# Altium PCB Main.PcbDoc
Units mil, origin at the board's own origin, x right, y up, seen from the top; angles counter-clockwise.
Board outline 1330 x 1245 mil, 4 copper layers (Top Layer, Int1 (GND), Int2, Bottom Layer), stack 61.811 mil thick; 29 components, 23 nets, 113 pads, 42 vias.
Unrouted connection lines stored in the file: 1.
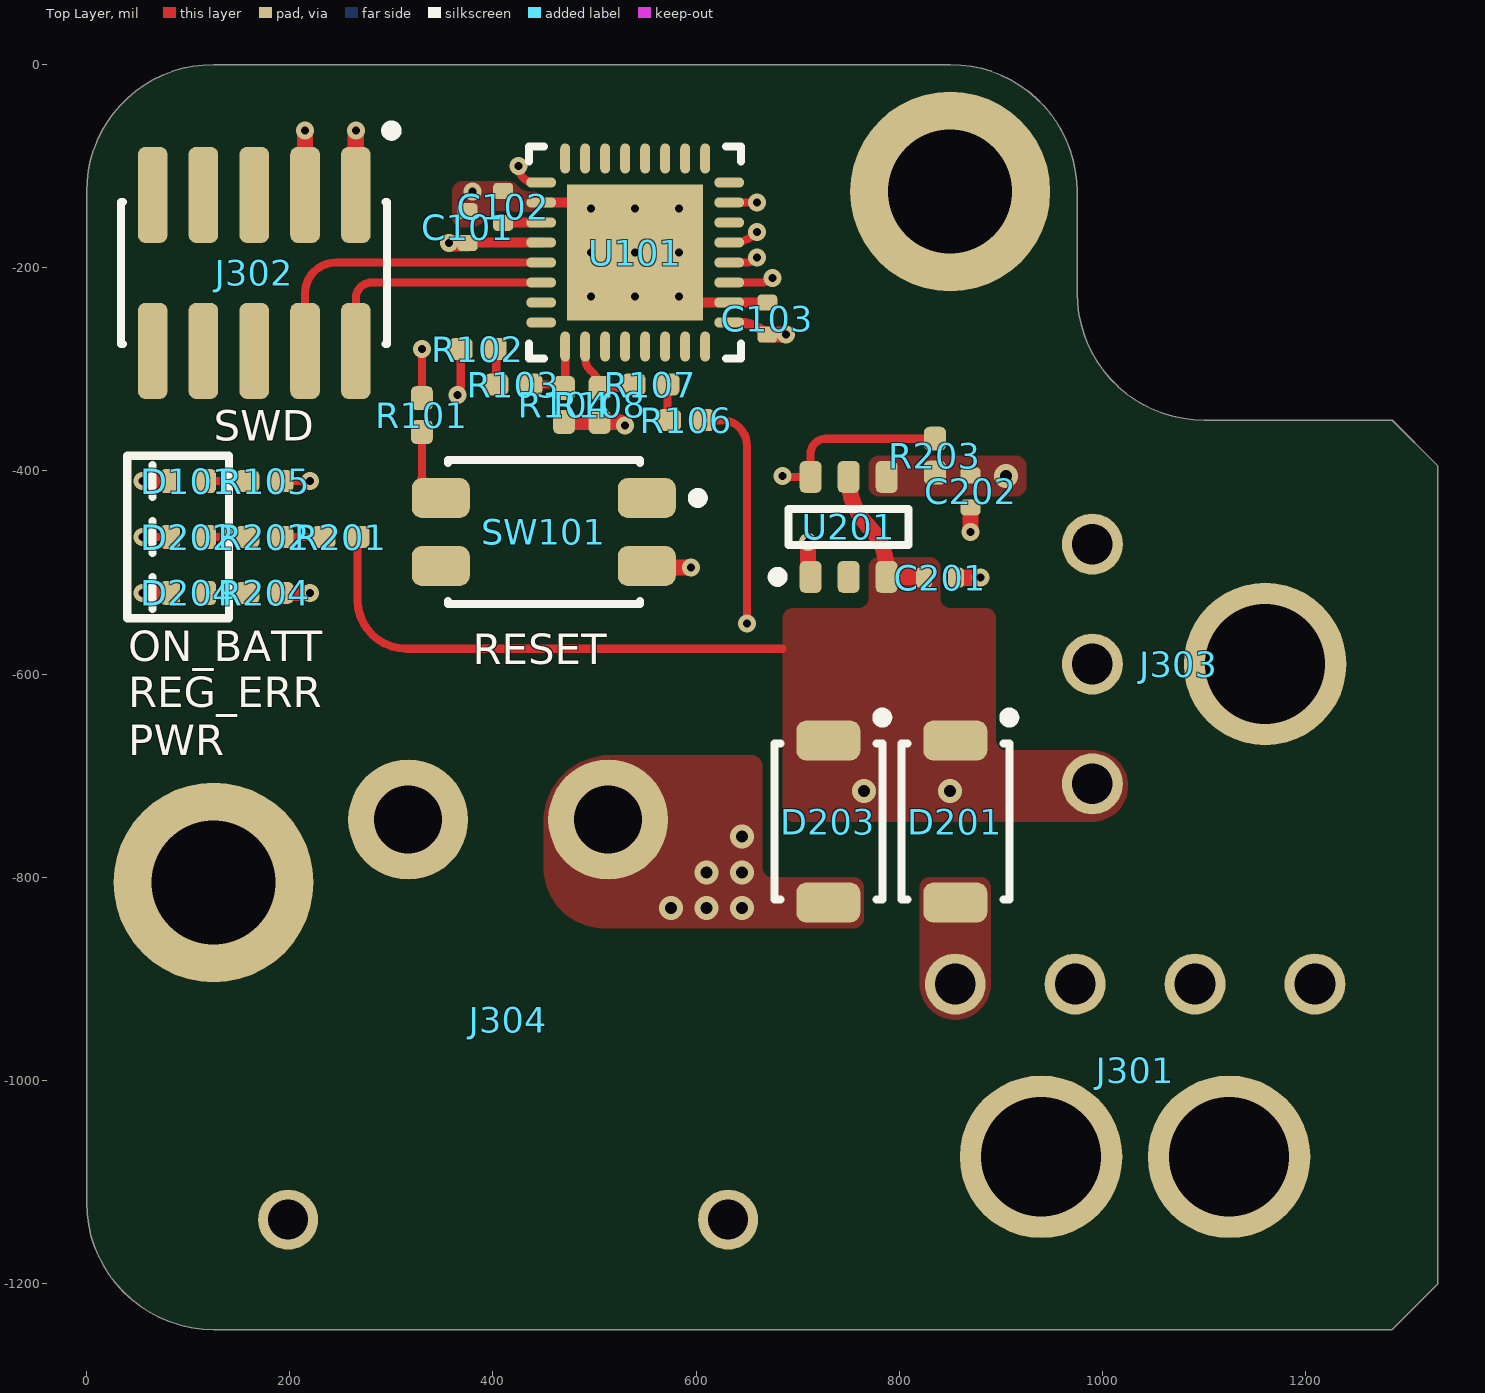
[diagram p0: Top Layer view]
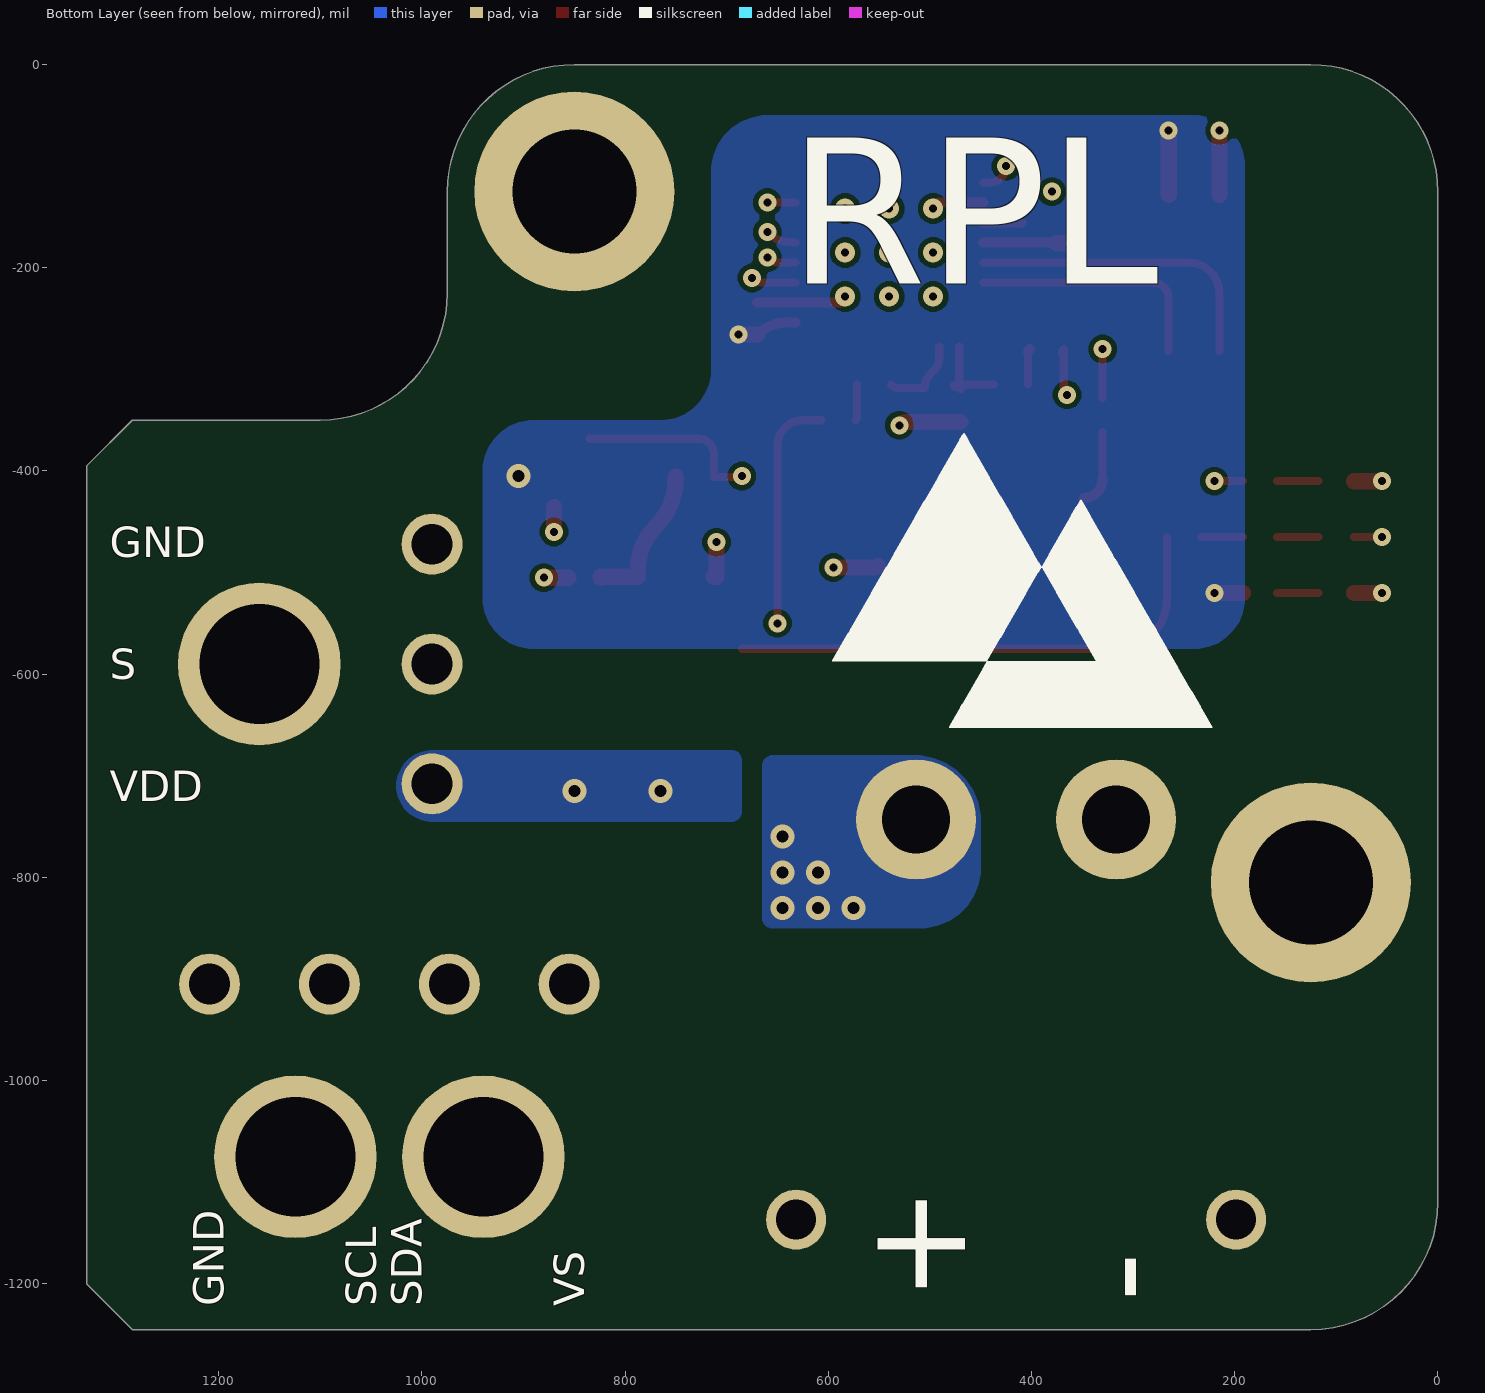
[diagram p1: Bottom Layer view, seen from below]
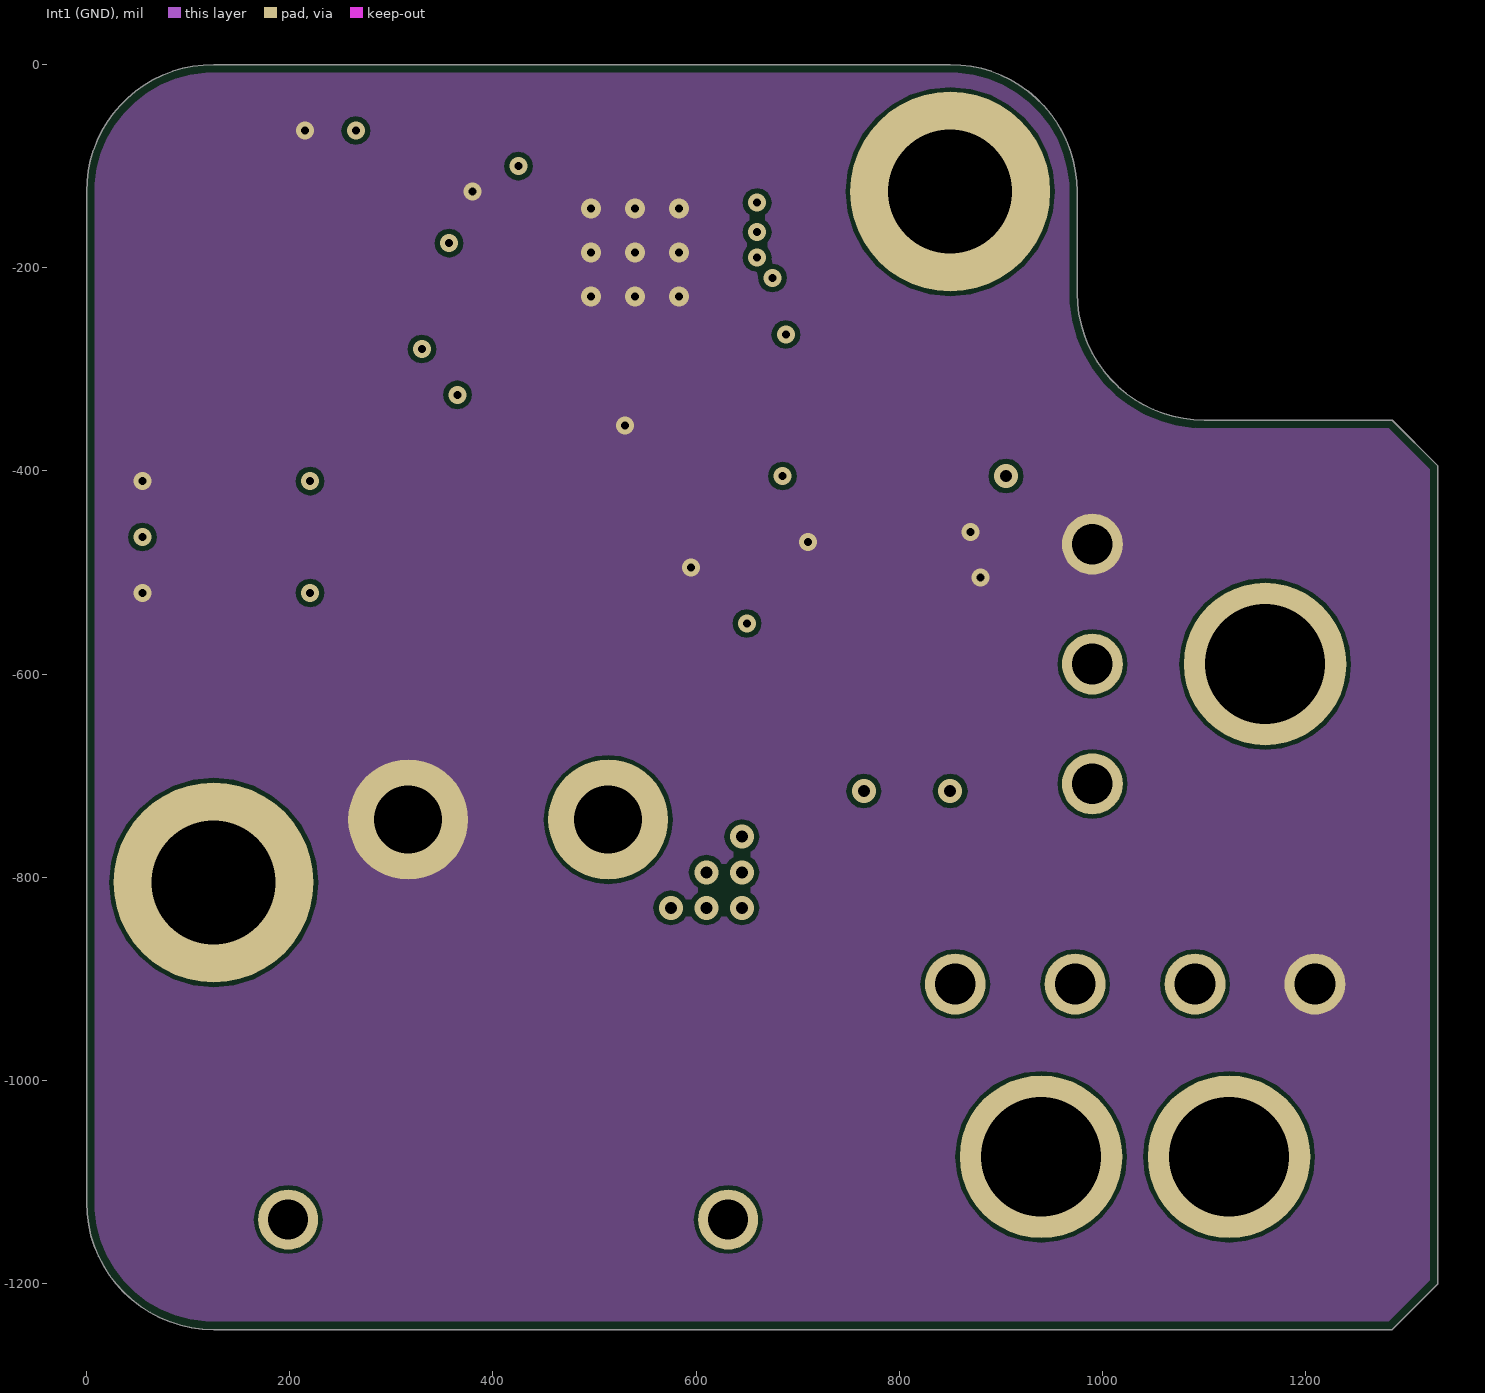
[diagram p2: Int1 (GND)]
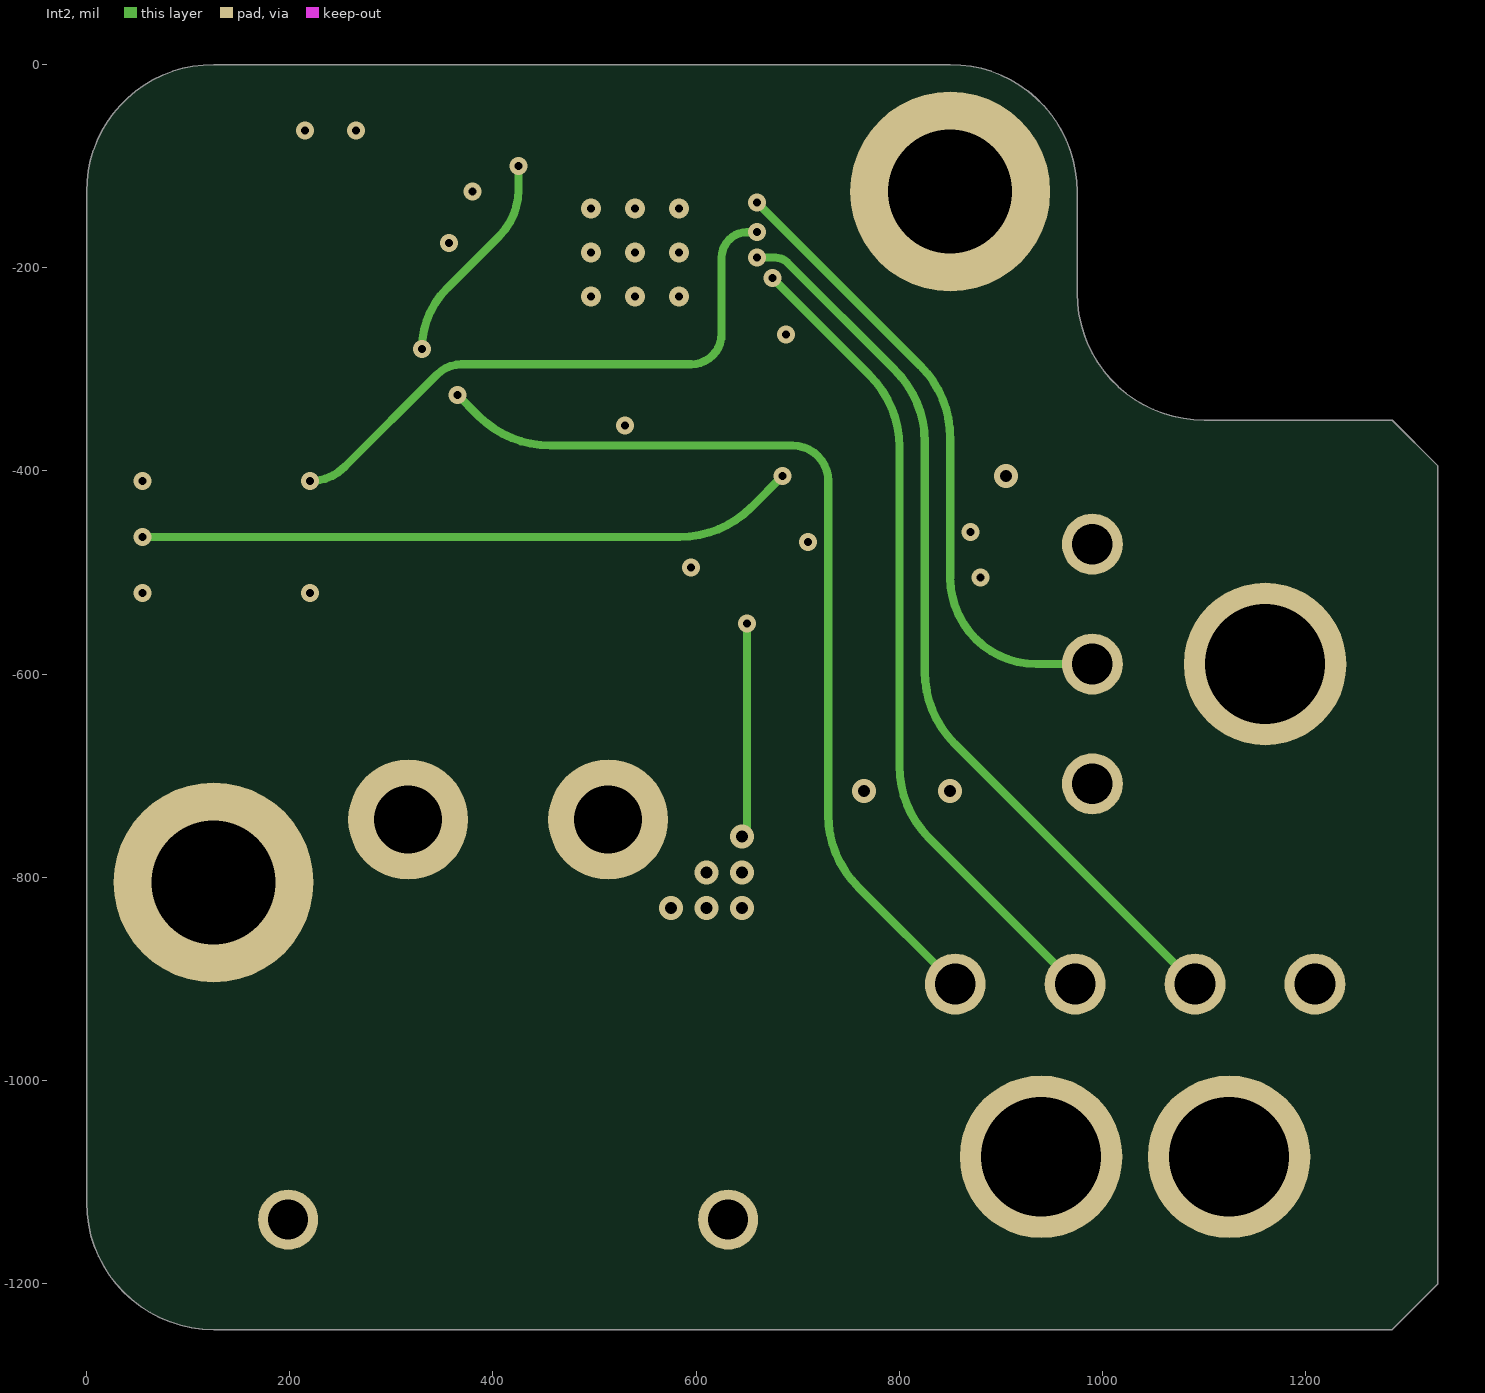
[diagram p3: Int2]
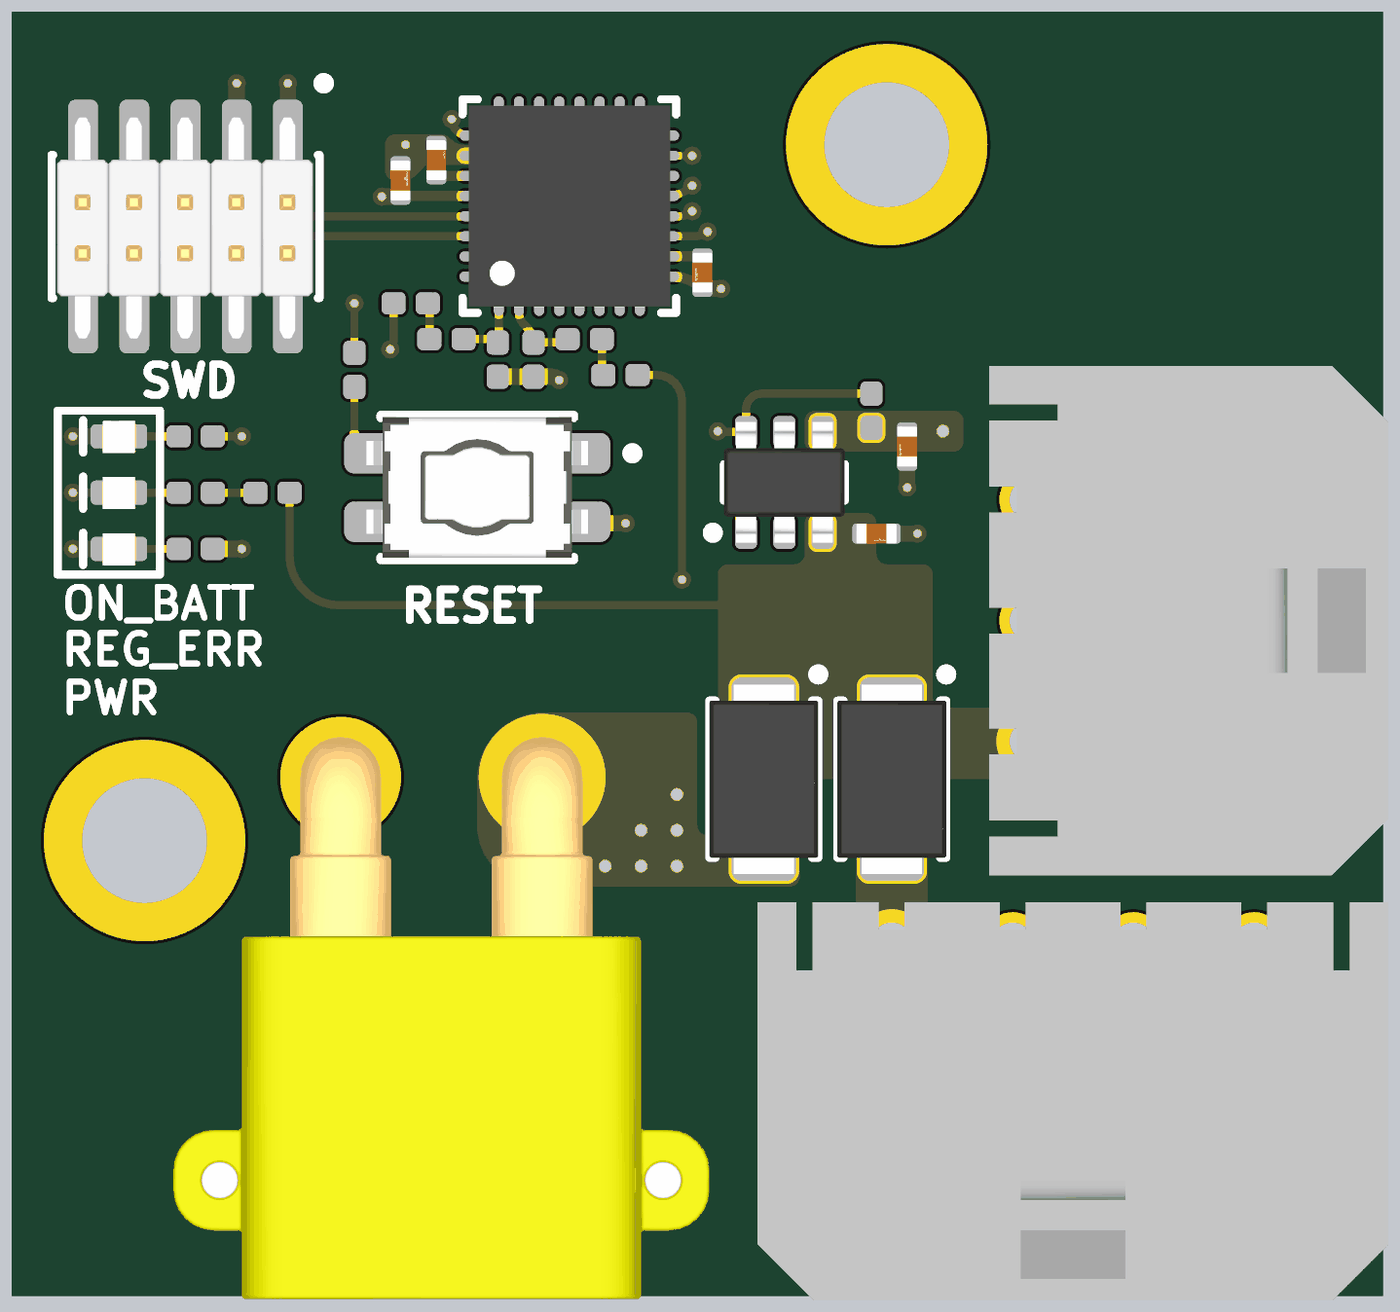
[diagram p4: 3D render of the assembled board from above, using the file's embedded part models]

## Layer stack, top to bottom
Top Solder: solder mask 0.5, SM-001, Dk 3.8
Top Layer: signal copper 1.378
Dielectric 1: prepreg 3.937, PP-017, Dk 4.05
Int1 (GND): signal copper 0.689
Dielectric 3: core 49.803, Core-039, Dk 4.5
Int2: signal copper 0.689
Dielectric 5: prepreg 3.937, PP-017, Dk 4.05
Bottom Layer: signal copper 1.378
Bottom Solder: solder mask 0.5, SM-001, Dk 3.8

## Board outline
0,-1120 0,-125 cw(c125,-125) 125,0 850,0 cw(c850,-125) 975,-125 975,-225 ccw(c1100,-225) 1100,-350 1285,-350 1330,-395 1330,-1200 1285,-1245 125,-1245 cw(c125,-1120)

## Design rules (kind name [scope] priority, off if disabled: settings)
BoardOutlineClearance [All] p1: gap=7.87 ignorepadtopadclearanceinfootprint=FALSE
Clearance [All] p1: gap=4 ignorepadtopadclearanceinfootprint=FALSE except(5: Arc-Via Track-Via SMDPad-Via THPad-Via Via-Via Via-Fill Via-Poly Via-Region Via-Text; 9.84: Arc-Hole Track-Hole SMDPad-Hole THPad-Hole Via-Hole Fill-Hole Poly-Hole Region-Hole Text-Hole)
ComponentClearance [All] p1: gap=4 collisioncheckmode=3 verticalgap=4 showdistances=TRUE
DiffPairsRouting [All] p1: maxlimit=4 minlimit=4 mostfreqgap=4 toplayer_minwidth=4 toplayer_maxwidth=71497.94 toplayer_prefwidth=4 midlayer1_minwidth=4 midlayer1_maxwidth=71497.94 midlayer1_prefwidth=4 midlayer2_minwidth=4 midlayer2_maxwidth=71497.94 midlayer2_prefwidth=4 bottomlayer_minwidth=4 bottomlayer_maxwidth=71497.94 bottomlayer_prefwidth=4 maxuncoupledlength=500
Height [All] p1: minheight=0 maxheight=71497.94 prefheight=500
HoleSize [All] p1: absolutevalues=TRUE maxlimit=248.03 minlimit=7.87 maxpercent=80.000 minpercent=20.000
HoleToHoleClearance [All] p1: gap=9.84 allowstackedmicrovias=FALSE
MinimumAnnularRing [All] p1: minimumring=3
MinimumSolderMaskSliver [All] p1: minsoldermaskwidth=0
PlaneClearance [All] p1: clearance=4
PlaneConnect PlaneConnectPowerPads [InPadClass('PowerPads')] p1: planeconnectstyle=Direct reliefexpansion=20 reliefentries=4 reliefconductorwidth=10 reliefairgap=10
PlaneConnect [All] p2: pad.planeconnectstyle=Relief pad.reliefexpansion=11.81 pad.reliefentries=4 pad.reliefconductorwidth=4 pad.reliefairgap=4 via.planeconnectstyle=Direct via.reliefexpansion=11.81 via.reliefentries=4 via.reliefconductorwidth=5 via.reliefairgap=5
PolygonConnect PolygonConnectPowerPads [All vs (InPadClass('PowerPads'))] p1: connectstyle=Direct reliefconductorwidth=10 reliefentries=4 polygonreliefangle="90 Angle" airgapwidth=10
PolygonConnect [All] p2: connectstyle=Direct reliefconductorwidth=16 reliefentries=4 polygonreliefangle="90 Angle" airgapwidth=4
RoomDefinition Power [InComponentClass('Power')] p1: confinementstyle=ConfineIn formatcopy=TRUE lockcomponents=FALSE outline 55,-855 925,-855 925,-340 55,-340
RoomDefinition SAMD21 [InComponentClass('SAMD21')] p2: confinementstyle=ConfineIn formatcopy=TRUE lockcomponents=FALSE outline 55,-545 700,-545 700,-65 55,-65
RoomDefinition Ports [InComponentClass('Ports')] p3: confinementstyle=ConfineIn formatcopy=TRUE lockcomponents=FALSE outline 20,-1260 1345,-1260 1345,-65 20,-65
RoutingVias [All] p1: holewidth=7.87 width=17.72 viastyle="Through Hole" minholewidth=7.87 minwidth=17.72 maxholewidth=248.03 maxwidth=257.87
SilkToSilkClearance [All] p1: silktosilkclearance=0
SilkToSolderMaskClearance [IsPad] p1: minsilkscreentomaskgap=4 clearancetoexposedcopper=TRUE
SolderMaskExpansion [All] p1: expansion=2.95 istentingtop=FALSE
Width [All] p1: maxlimit=71497.94 minlimit=4 preferedwidth=4
20 further rules are at their usual default settings.

## Classes and differential pairs
component class SAMD21: C101 C102 C103 D101 R101 R102 R103 R104 R105 R106 R107 R108 SW101 U101
component class Power: C201 C202 D201 D202 D203 D204 R201 R202 R203 R204 U201
component class Ports: J301 J302 J303 J304

## Components (designator, comment, footprint, x,y, rotation, side; value= is the part's Value field where it differs from the comment)
C101 "100n" FP-GCM155-0_05-MFG 375,-160 r90 top
C102 "1u" FP-GRM155-0_1-MFG 410,-140 r90 top
C103 "100n" FP-GCM155-0_05-MFG 670,-250 r270 top
C201 "470n" FP-GRT155-0_05-MFG 840,-505 r0 top
C202 "470n" FP-GRT155-0_05-MFG 870,-420 r270 top
D101 "Orange" FP-SML-P1-MFG 100,-410 r0 top
D201 "5A" SODFL470X105-2L 855,-745 r270 top
D202 "Red" FP-SML-P1-MFG 100,-465 r0 top
D203 "5A" SODFL470X105-2L 730,-745 r270 top
D204 "Green" FP-SML-P1-MFG 100,-520 r0 top
J301 "436500400" 436500400 1209,-905 r180 top
J302 "M50-3600542" FP-M50-3600542-MFG 165,-205 r180 top
J303 "436500300" 436500300 990,-472 r270 top
J304 "XT30PW-M" XT30PW-M 415,-940 r180 top locked
R101 "5k1" RESC1005X04N 330,-345 r90 top
R102 "5k1" RESC1005X04N 385,-280 r180 top
R103 "5k1" RESC1005X04N 420,-315 r180 top
R104 "5k1" RESC1005X04N 470,-335 r90 top
R105 "470" RESC1005X04N 175,-410 r180 top
R106 "5k1" RESC1005X04N 590,-350 r0 top
R107 "5k1" RESC1005X04N 555,-315 r0 top
R108 "5k1" RESC1005X04N 505,-335 r90 top
R201 "470" RESC1005X04N 250,-465 r0 top
R202 "470" RESC1005X04N 175,-465 r0 top
R203 "330k" RESC1005X04N 835,-385 r90 top
R204 "470" RESC1005X04N 175,-520 r0 top
SW101 "EVQ-P2402M" EVQ-P2402M 450,-460 r270 top
U101 "ATSAMD21E17L" QFN50P500X500X100_HS-33L 540,-185 r90 top
U201 "3v3" SOT95P280X145-6L 750,-455 r90 top

## Footprints (in the part's own frame and the unit in brackets; to place one, negate y for a bottom-side part, rotate by r counter-clockwise, add the part's x,y. Pads: shape width x height; smd on the part's side, far side on the other; paste and mask are expansions set on the pad)
436500300 [mil] "Molex 3 Pin Micro-Fit Single Row"
  round 60 hole 40 paste+0: 1(0,0) 2(118,0) 3(236,0)
  round 160 hole 118 paste+0: ""(118,170)
  body extent -131,-40 367,350, height 223
436500400 [mil] "Molex 4 Pin Micro-Fit Single Row"
  round 60 hole 40 paste+0: 1(0,0) 2(118,0) 3(236,0) 4(354,0)
  round 160 hole 118 paste+0: ""(84.5,170) ""(269.5,170)
  body extent -131,-40 485,350, height 220
EVQ-P2402M [mm] "Tactile Switch"
  rrect50% 1x1.45 smd paste+0: 1(-0.85,2.575) 2(0.85,2.575) 3(-0.85,-2.575) 4(0.85,-2.575)
  silkscreen extent -1.8,-2.4 1.8,3.98, body extent -1.9,-3.4 1.9,3.4, height 0.25
FP-GCM155-0_05-MFG [mm]
  rrect50% 0.4x0.5 smd paste+0 mask+0: 1(-0.4,0) 2(0.4,0)
  body extent -0.7,-0.38 0.7,0.38, height 0.25
FP-GRM155-0_1-MFG [mm]
  rrect50% 0.4x0.5 smd paste+0 mask+0: 1(-0.4,0) 2(0.4,0)
  body extent -0.7,-0.38 0.7,0.38, height 0.25
FP-GRT155-0_05-MFG [mm]
  rrect50% 0.4x0.5 smd paste+0 mask+0: 1(-0.4,0) 2(0.4,0)
  body extent -0.7,-0.38 0.7,0.38, height 0.25
FP-M50-3600542-MFG [mm]
  rrect50% 0.74x2.4 smd paste+0 mask+0: 1(-2.54,-1.95) 2(-2.54,1.95) 3(-1.27,-1.95) 4(-1.27,1.95) 5(0,-1.95) 6(0,1.95) 7(1.27,-1.95) 8(1.27,1.95) 9(2.54,-1.95) 10(2.54,1.95)
  silkscreen extent -3.32,-1.78 3.32,1.78, body extent -3.42,-3.25 3.42,3.25, height 0.25
FP-SML-P1-MFG [mm]
  rrect50% 0.5x0.6 smd paste+0 mask+0: 1(-0.45,0) 2(0.45,0)
  silkscreen extent -0.89,-0.4 -0.89,0.4, body extent -0.8,-0.43 0.8,0.43, height 0.25
QFN50P500X500X100_HS-33L [mm] "QFN, 32-Leads, Body 5.00x5.00mm, Pitch 0.50mm, Thermal Pad 3.60x3.60mm, IPC High Density"
  oval 0.75x0.25 smd: 1(-2.35,1.75) 2(-2.35,1.25) 3(-2.35,0.75) 4(-2.35,0.25) 5(-2.35,-0.25) 6(-2.35,-0.75) 7(-2.35,-1.25) 8(-2.35,-1.75) 17(2.35,-1.75) 18(2.35,-1.25) 19(2.35,-0.75) 20(2.35,-0.25) 21(2.35,0.25) 22(2.35,0.75) 23(2.35,1.25) 24(2.35,1.75)
  oval 0.25x0.75 smd: 9(-1.75,-2.35) 10(-1.25,-2.35) 11(-0.75,-2.35) 12(-0.25,-2.35) 13(0.25,-2.35) 14(0.75,-2.35) 15(1.25,-2.35) 16(1.75,-2.35) 25(1.75,2.35) 26(1.25,2.35) 27(0.75,2.35) 28(0.25,2.35) 29(-0.25,2.35) 30(-0.75,2.35) 31(-1.25,2.35) 32(-1.75,2.35)
  rect 3.4x3.4 smd paste-1.7: 33(0,0)
  silkscreen extent -2.65,-2.65 2.65,2.65, body extent -2.5,-2.5 2.5,2.5, height 1
RESC1005X04N [mm] "Chip Resistor, 2-Leads, Body 1.00x0.50mm, IPC Medium Density"
  rrect50% 0.6x0.55 smd: 1(-0.425,0) 2(0.425,0)
  body extent -0.53,-0.28 0.53,0.28, height 0.35
SODFL470X105-2L [mm] "SODFL, 2-Leads, Body 2.50x4.70mm, IPC High Density"
  rrect50% 1x1.6 smd: 1(-2.025,0) 2(2.025,0)
  silkscreen extent -2.72,-1.35 1.95,1.48, body extent -2.35,-1.35 2.35,1.35, height 1.05
SOT95P280X145-6L [mm] "SOT23, 6-Leads, Body 2.90x2.80mm, Pitch 0.95mm, IPC High Density"
  rrect50% 0.8x0.55 smd: 1(-1.25,0.95) 2(-1.25,0) 3(-1.25,-0.95) 4(1.25,-0.95) 5(1.25,0) 6(1.25,0.95)
  silkscreen extent -1.37,-1.5 0.45,1.9, body extent -1.5,-1.5 1.5,1.5, height 1.45
XT30PW-M [mm]
  round 3 hole 1.7 paste+0: 1(-2.5,-5) 2(2.5,-5)
  round 1.5 hole 1 paste+0: ""(-5.5,5) ""(5.5,5)
  body extent -6.65,-6 6.65,7.95, height 5.5

## Part data
C101 C103: library part GCM155R71H104KE02J, "Ceramic Capacitor for Automotive 100nF ±10% 50VDC X7R 0402 Paper T/R", Capacitance=100nF, Case Code (Imperial)=0402, Case Code (Metric)=1005, Dielectric=X7R, Max Operating Temperature=125°C, Min Operating Temperature=-55°C, Package Quantity=50000, Ratings=AEC-Q200, Supplier Part Number 1=490-14514-1-ND, Tolerance=10%, Voltage Rating=50V, Case/Package=0402, Height=0.5mm, Length=0.039inch, Mount="Surface Mount", Packaging="Tape and Reel", Supplier 1=Digi-Key, Termination=SMD/SMT, Thickness=0.022inch, Voltage Rating (DC)=50V, Weight=0.000212oz, Width=0.02inch
C102: library part GRM155R61H105ME05D, "Chip Multilayer Ceramic Capacitors for General Purpose, 0402, 1.0uF, X5R, 15%, 20%, 50V", Supplier Part Number 1=490-GRM155R61H105ME05DTR-ND, Supplier 1=Digi-Key
C201 C202: library part GRT155R61E474KE01D, "Multi-Layer Ceramic Capacitor 470nF 25V X5R ±10% 0402 Paper T/R", Capacitance=470nF, Case Code (Imperial)=0402, Case Code (Metric)=1005, Max Operating Temperature=85°C, Min Operating Temperature=-55°C, Ratings=AEC-Q200, Supplier Part Number 1=490-12269-1-ND, Tolerance=10%, Voltage Rating=25V, Case/Package=0402, Length=0.039inch, Mount="Surface Mount", Packaging="Tape and Reel", Supplier 1=Digi-Key, Thickness=0.022inch, Width=0.02inch
D101: library part SML-P11DTT86R, "LED ORANGE CLEAR 1006 SMD", Forward Current=1mA, Forward Voltage=1.9V, Manufacturer=Rohm, Package=SML-P11, Power Dissipation=52mW, Reverse Voltage=5V, Supplier Part Number 1=SML-P11DTT86RCT-ND, Temperature="-40°C to +85°C", Temperature Range High=+85°C, Temperature Range Low=-40°C, Automotive=No, Category=Diode, Colour=Orange, ComponentLink2Description=Datasheet, ComponentLink2URL=https://d1d2qsbl8m0m72.cloudfront.net/en/products/databook/datasheet/opto/led/chip_mono/sml-p11-e.pdf, Device Class L1=Optoelectronics, Device Class L2=LEDs, Device Class L3=unset, Digikey Description="LED ORANGE CLEAR 1006 SMD", Height=0.25mm, Lead Free=Yes, Led Orientation="Top View", Luminous Intensity=7.3mcd, Manufacturer Part Number=SML-P11DTT86R, Mouser Description="LED Uni-Color Orange 2-Pin Chip 0402(1006Metric) T/R", Octopart=https://octopart.com/sml-p11dtt86r-rohm-34112313, RoHS=TRUE, Supplier 1=Digi-Key, Wavelength=605nm
D201 D203: library part RB080LAM-30TR, Supplier Part Number 1=RB080LAM-30CT-ND, Supplier 1=Digi-Key
D202: library part SML-P11UTT86R, "LED RED CLEAR 1006 SMD", Forward Current=1mA, Forward Voltage=1.8V, Manufacturer=Rohm, Package=SML-P1, Power Dissipation=50mW, Reverse Voltage=5V, Supplier Part Number 1=SML-P11UTT86RCT-ND, Temperature="-40°C to +85°C", Temperature Range High=+85°C, Temperature Range Low=-40°C, Automotive=No, Category=Diode, Colour=Red, ComponentLink2Description=Datasheet, ComponentLink2URL=https://www.rohm.com/datasheet/SML-P11UT(R)/sml-p11-e, Device Class L1=Optoelectronics, Device Class L2=LEDs, Device Class L3=unset, Digikey Description="LED RED CLEAR 1006 SMD", Height=0.25mm, Lead Free=Yes, Led Orientation="Top View", Luminous Intensity=2.5mcd, Manufacturer Part Number=SML-P11UTT86R, Mouser Description="Led, Picoled, Red, 621 Nm, 1.8 V, 1 Ma, 2.5 Mcd", Octopart=https://octopart.com/sml-p11utt86r-rohm-39058751, RoHS=TRUE, Supplier 1=Digi-Key, Wavelength=621nm
D204: library part SML-P13PTT86R, "LED GREEN CLEAR 1006 SMD", Forward Current=20mA, Forward Voltage=2.1V, Manufacturer=Rohm, Package=SML-P1, Power Dissipation=52mW, Reverse Voltage=5V, Supplier Part Number 1=846-1197-1-ND, Temperature="-40°C to +85°C", Temperature Range High=+85°C, Temperature Range Low=-40°C, Automotive=No, Category=Diode, Colour=Green, ComponentLink2Description=Datasheet, ComponentLink2URL=https://d1d2qsbl8m0m72.cloudfront.net/en/products/databook/datasheet/opto/led/chip_mono/sml-p1-e.pdf, Device Class L1=Optoelectronics, Device Class L2=LEDs, Device Class L3=unset, Digikey Description="LED GREEN CLEAR 1006 SMD", Height=0.25mm, Lead Free=Yes, Led Orientation="Top View", Luminous Intensity=10mcd, Manufacturer Part Number=SML-P13PTT86R, Mouser Description="LED Uni-Color Green 2-Pin Chip 0402(1006Metric) T/R", Octopart=https://octopart.com/sml-p13ptt86r-rohm-59370256, RoHS=TRUE, Supplier 1=Digi-Key, Wavelength=560nm
J301: Supplier Part Number 1=WM1862-ND, Supplier 1=Digi-Key
J302: "CONN HEADER SMD 10POS 1.27MM", Color=Black, Contact Resistance=30mR, Current Rating=1A, Insulation Resistance=5GR, Max Operating Temperature=105°C, Min Operating Temperature=-40°C, Package Quantity=1000, Supplier Part Number 1=952-1389-ND, Contact Material="Copper Alloy", Contact Mating Length=0.118inch, Contact Plating=Gold, Depth=3.41mm, Gender=Male, Housing Material=Thermoplastic, Insulation Material=Thermoplastic, Length=6.35mm, Material=Thermoplastic, Max Current Rating=1A, Mount="Surface Mount", Number of Contacts=10, Number of Positions=10, Number of Rows=2, Orientation=Straight, Packaging=Tray, Pitch=1.27mm, Radiation Hardening=No, REACH SVHC="No SVHC", Row Spacing=0.05inch, Supplier 1=Digi-Key, Termination=Solder
J303: Supplier Part Number 1=WM1861-ND, Supplier 1=Digi-Key
R101 R102 R103 R104 R106 R107 R108: library part ERJ-U02J512X, Manufacturer=Panasonic, Part Number=ERJ2RKF27R0X, Supplier Part Number 1=667-ERJ-U02J512X, Supplier 1=Mouser
R105 R201 R202 R204: library part ERJ-U02J471X, Manufacturer=Panasonic, Part Number=ERJ2RKF27R0X, Supplier Part Number 1=10-ERJ-U02J471XCT-ND, Supplier 1=Digi-Key
R203: library part ERJ-2GEJ334X, Manufacturer=Panasonic, Part Number=ERJ2RKF27R0X, Supplier Part Number 1=P330KJCT-ND, Supplier 1=Digi-Key
SW101: Supplier Part Number 1=P11080SCT-ND, Supplier 1=Digi-Key
U101: Supplier Part Number 1=ATSAMD21E17L-MNT, Supplier 1="Arrow Electronics"
U201: library part ADP3300ARTZ-3.3RL7, "High Accuracy anyCAP(R) 50 mA Low Dropout Linear Regulator, 3 to 12 V Vin, 3.3 V Vout, Industrial, 6-pin SOT23 (RT-6), Reel", Manufacturer="Analog Devices", Preset Vout Values (V)=3.3, Supplier Part Number 1=ADP3300ARTZ3.3RCT-ND, Supply Current IGND @ Small Load=190uA, ComponentLink1Description="Manufacturer URL", ComponentLink1URL=http://www.analog.com/en/index.html, ComponentLink2Description=Datasheet, ComponentLink2URL=http://www.analog.com/static/imported-files/data_sheets/ADP3300.pdf, ComponentLink3Description="Package Specification", ComponentLink3URL=http://www.analog.com/static/imported-files/data_sheets/ADG465.pdf, ComponentLink4Description="URL Link1", ComponentLink4URL="Product URL:http://www.analog.com/en/ADP3300/productSearch.html", DatasheetVersion="Rev. B", Iout max=50mA, Mounting Technology="Surface Mount", PackageDescription="6-Pin Plastic Surface Mount SOT-23 Package, Body 2.9 x 1.65 mm, Pitch 0.95 mm", PackageReference=RT-6, PackageVersion="REV. A, 11/2006", Packing=Reel, PartNumber=ADP3300ARTZ-3.3RL7, Supplier 1=Digi-Key, Vin (max) (V)=12, Vin (min) (V)=3

## Free pads (board coordinates)
  round 196.85 hole 122.05 paste+0: ""(125,-805) ""(850,-125)

## Via types
v1: diameter 17.72, hole 7.87, Top Layer to Bottom Layer, tented both sides, 24 vias
v2: diameter 19.68, hole 7.87, Top Layer to Bottom Layer, 9 vias
v3: diameter 23.62, hole 11.81, Top Layer to Bottom Layer, tented both sides, 9 vias

## Nets (pads, with @x,y where several pads share a name; then routed paths per layer and width w, separated by ;. In a path a pad name is that pad's centre, name@x,y a point inside that pad or via, vN(x,y) a via of type N, cw(c..) or ccw(c..) an arc to the next point about the centre after c; other vN are vias at no path point)
3v3: C101.1 C103.2 C202.1 J302.1 R203.1 R204.2 U101.9 U101.28 U201.4 | length 244
  Top Layer w8: U101.28@447.18,-175.45 U101.28
  Top Layer w10: C101.1 375,-175.16 U101.28 ; U101.9 641.39,-253.9 cw(c641.39,-294.36) C103.2 ; v1(688.19,-265.75) ccw(c688.19,-263.19) v1@690,-265
  Top Layer w16: R204.2 v1(220,-520) ; J302.1 v1(265,-65) ; v1(356.81,-175.75) C101.1 ; C103.2 v1(688.19,-265.75)
  other v3: 905,-405
GND: C101.2 C102.2 C103.1 C201.2 C202.2 D101.1 D204.1 J301.1 J302.3 J303.1 J304.2 R104.1 R108.1 SW101.2 U101.10 U101.26 U101.33 U201.1 | length 450.7
  Top Layer w10: U101.26 490.79,-135.79 cw(c490.79,-141.69) v2(496.69,-141.69) ; v2(583.31,-228.31) ccw(c589.21,-228.31) 589.21,-234.21 U101.10 669.96,-234.21 C103.1
  Top Layer w16: v1(55,-520) D204.1 ; v1(55,-410) D101.1 ; J302.3 v1(215,-65) ; R104.1 R108.1 522.11,-351.73 cw(c522.11,-362.89) v1(530,-355) ; SW101.2 ccw(c555.08,-489.76) 555.08,-495 v1(595,-495) ; v1(710,-470) 710,-504.21 U201.1 ; C201.2 v1(880,-505) ; v1(870,-460) C202.2
  other v1: 380,-125
  other v2: 496.69,-228.31 540,-228.31 496.69,-185 540,-185 583.31,-185 540,-141.69 583.31,-141.69
NetC102_1: C102.1 U101.27 | length 37.6
  Top Layer w10: C102.1 410.2,-155.55 447.4,-155.55 U101.27
NetD101_2: D101.2 R105.2 | length 40.6
  Top Layer w8: D101.2 R105.2
NetD202_1: D202.1 R203.2 U201.6 | length 859.2
  Top Layer w8: v1(55,-465) D202.1 ; v1(685,-405) ccw(c686.9,-403.1) 686.9,-405.79 U201.6 712.6,-383.15 cw(c727.48,-383.15) 727.48,-368.27 R203.2
  Int2 w8: v1(55,-465) 583.58,-465 ccw(c583.58,-365) 654.29,-435.71 v1(685,-405)
NetD202_2: D202.2 R202.1 | length 40.6
  Top Layer w8: D202.2 R202.1
NetD204_2: D204.2 R204.1 | length 40.6
  Top Layer w8: D204.2 R204.1
NetR101_1: R101.1 SW101.3 | length 75.4
  Top Layer w8: SW101.3@330,-407.91 R101.1
  Top Layer w10: SW101.3@330,-407.91 ccw(c348.62,-407.91) SW101.3
NetR101_2: R101.2 U101.25 | length 292.9
  Top Layer w8: R101.2 v1(330,-280) ; v1(425,-100) ccw(c441.1,-100) 441.1,-116.1 U101.25
  Int2 w8: v1(330,-280) cw(c414.5,-280) 354.74,-220.26 406.32,-168.68 ; 406.33,-168.67 ccw(c361.21,-123.58) 425,-123.58 v1(425,-100)
NetR102_1: R102.1 R103.2 | length 35.4
  Top Layer w8: R103.2 R102.1@403.27,-283.71
  Top Layer w10: R102.1 cw(c398.03,-283.71) R102.1@403.27,-283.71
NetR105_1: R105.1 U101.13 | length 648.9
  Top Layer w8: R105.1 v1(220,-410) ; U101.13 635.48,-175.16 ccw(c635.48,-140.48) v1(660,-165)
  Int2 w8: v1(220,-410) ccw(c220,-361.72) 254.14,-395.86 345,-305 cw(c369.14,-329.14) 369.14,-295 595,-295 ccw(c595,-265) 625,-265 625,-190 cw(c650,-190) 650,-165 v1(660,-165)
NetR106_1: R106.1 R107.2 | length 35.4
  Top Layer w8: R107.2 571.73,-346.29 ccw(c576.97,-346.29) R106.1
NetR201_1: R201.1 R202.2 | length 41.5
  Top Layer w8: R202.2 R201.1
PULSE: J303.2 U101.15 | length 659.6
  Top Layer w8: U101.15 v1(660,-135.79)
  Int2 w8: v1(660,-135.79) 820.71,-296.5 cw(c750,-367.21) 850,-367.21 850,-505 ccw(c935,-505) 935,-590 J303.2
SCL: J301.2 U101.12 | length 927.6
  Top Layer w8: U101.12 648.31,-194.84 ccw(c648.31,-178.31) v1(660,-190)
  Int2 w8: v1(660,-190) 677.93,-190 cw(c677.93,-207.07) 690,-195 795.71,-300.71 cw(c725,-371.42) 825,-371.42 825,-597.58 ccw(c925,-597.58) 854.29,-668.29 J301.2
SDA: J301.3 U101.11 | length 853.5
  Top Layer w8: U101.11 664.07,-214.53 ccw(c664.07,-199.07) v1(675,-210)
  Int2 w8: v1(675,-210) 770.71,-305.71 cw(c700,-376.42) 800,-376.42 800,-690.58 ccw(c900,-690.58) 829.29,-761.29 J301.3
SWCLK: J302.4 U101.29 | length 306.5
  Top Layer w8: J302.4 215,-225 cw(c245.16,-225) 245.16,-194.84 U101.29
SWDIO: J302.2 U101.30 | length 243.1
  Top Layer w8: J302.2 265,-230 cw(c280.47,-230) 280.47,-214.53 U101.30
VBAT: D203.2 J304.1 R106.2 | length 445.4
  Top Layer w8: R106.2 625,-350 cw(c625,-375) 650,-375 v1(650,-550)
  Int2 w8: v3(645,-760) ccw(c645,-755) 650,-755 v1(650,-550)
  other v3: 575,-830 610,-830 645,-830 610,-795 645,-795
VDD: C201.1 D201.1 D203.1 J303.3 R201.2 U201.3 U201.5 | length 653.6
  Top Layer w8: R201.2 266.73,-526.73 ccw(c315,-526.73) 315,-575 685,-575
  Top Layer w16: U201.5 750,-406.72 ccw(c818.28,-406.72) 770,-455 cw(c727.99,-497.01) 787.4,-497.01 U201.3 824.25,-504.21 C201.1
  other v3: 765,-715 850,-715
VS: D201.2 J301.4 R102.2 | length 994.4
  Top Layer w8: v1(365,-325) ccw(c357.11,-317.11) 368.27,-317.11 R102.2 cw(c364.09,-284.18) R102.2@370,-284.18
  Int2 w8: v1(365,-325) 385.71,-345.71 ccw(c456.42,-275) 456.42,-375 605,-375 695,-375 cw(c695,-410) 730,-410 730,-738.58 ccw(c830,-738.58) 759.29,-809.29 J301.4
VSENS1: R103.1 R104.2 U101.1 | length 74.6
  Top Layer w8: R103.1 R104.2@473.27,-315 ; R104.2@471.1,-309.77 U101.1
  Top Layer w10: R104.2 cw(c475.23,-323.5) R104.2@475.23,-316.1
VSENS2: R107.1 R108.2 U101.2 | length 79.3
  Top Layer w8: U101.2 490.79,-289.83 ccw(c505.17,-289.83) 494.99,-299.99 499.15,-304.15 cw(c485.04,-318.27) R108.2 530.38,-318.27 ccw(c530.38,-307.11) R107.1
pads on no net: J301. J302.5 J302.6 J302.7 J302.8 J302.9 J302.10 J303. J304. SW101.1 SW101.4 U101.3 U101.4 U101.5 U101.6 U101.7 U101.8 U101.14 U101.16 U101.17 U101.18 U101.19 U101.20 U101.21 U101.22 U101.23 U101.24 U101.31 U101.32 U201.2

## Polygon pours and split planes (outlines as drawn)
GND on Top Layer "GND_L01_P016" (solid, pour order 16): 440,-145 ccw(c440,-140) 445,-140 445,-130 ccw(c440,-130) 440,-125 437.07,-125 cw(c437.07,-107.93) 425,-120 423.54,-118.54 ccw(c415,-127.07) 415,-115 370,-115 ccw(c370,-125) 360,-125 360,-150 ccw(c370,-150) 370,-160 377.93,-160 ccw(c377.93,-142.93) 390,-155 396.46,-148.54 cw(c405,-157.07) 405,-145
VBAT on Top Layer "VBAT_L01_P014" (solid, pour order 14): 665,-790 ccw(c675,-790) 675,-800 755,-800 cw(c755,-810) 765,-810 765,-840 cw(c755,-840) 755,-850 510,-850 cw(c510,-790) 450,-790 450,-745 cw(c515,-745) 515,-680 655,-680 cw(c655,-690) 665,-690
VDD on Top Layer "VDD_L01_P013" (solid, pour order 13): 895,-665 ccw(c905,-665) 905,-675 990,-675 cw(c990,-710) 1025,-710 cw(c990,-710) 990,-745 695,-745 cw(c695,-735) 685,-735 685,-545 cw(c695,-545) 695,-535 760,-535 ccw(c760,-525) 770,-525 770,-495 cw(c780,-495) 780,-485 830,-485 cw(c830,-495) 840,-495 840,-525 ccw(c850,-525) 850,-535 885,-535 cw(c885,-545) 895,-545
3v3 on Top Layer "3V3_L01_P004" (solid, pour order 4): 770,-415 ccw(c780,-415) 780,-425 915,-425 ccw(c915,-415) 925,-415 925,-395 ccw(c915,-395) 915,-385 780,-385 ccw(c780,-395) 770,-395 770,-410
VS on Top Layer "VS_L01_P007" (solid, pour order 7): 880,-800 cw(c880,-810) 890,-810 890,-905 cw(c855,-905) 855,-940 cw(c855,-905) 820,-905 820,-810 cw(c830,-810) 830,-800
3v3 on Bottom Layer "3V3_L04_P017" (solid, pour order 17): 940,-400 ccw(c890,-400) 890,-350 765,-350 cw(c765,-300) 715,-300 715,-105 ccw(c660,-105) 660,-50 240,-50 ccw(c240,-100) 190,-100 190,-525 ccw(c240,-525) 240,-575 890,-575 ccw(c890,-525) 940,-525
VBAT on Bottom Layer "VBAT_L04_P008" (solid, pour order 8): 665,-840 cw(c655,-840) 655,-850 510,-850 cw(c510,-790) 450,-790 450,-745 cw(c515,-745) 515,-680 655,-680 cw(c655,-690) 665,-690
VDD on Bottom Layer "VDD_L04_P006" (solid, pour order 6): 695,-675 ccw(c695,-685) 685,-685 685,-735 ccw(c695,-735) 695,-745 990,-745 ccw(c990,-710) 1025,-710 ccw(c990,-710) 990,-675
GND on Int1 (GND) "GND_L02_P018" (solid, pour order 18): 0,-1120 0,-125 cw(c125,-125) 125,0 850,0 cw(c850,-125) 975,-125 975,-225 ccw(c1100,-225) 1100,-350 1285,-350 1330,-395 1330,-1200 1285,-1245 125,-1245 cw(c125,-1120)

## Silkscreen, mask and mechanical layers (free items; w line width, h text height)
Top Overlay:
  circle w10: c300,-65 r5
  lines w8: 40,-545 140,-545 140,-385 40,-385 40,-545
  text "SWD" at 125.01,-370 h30
  text "ON_BATT" at 41,-587.5 h30
  text "RESET" at 380.02,-590 h30
  text "REG_ERR" at 41,-632.5 h30
  text "PWR" at 41,-680 h30
Bottom Overlay:
  region: 1653 vertices and 1 holes, not listed, extent 222.04,-652.74 596.04,-363.01
  text "RPL" at 639.86,-272.96 h300
  text "GND" at 1307,-485 h30
  text "S" at 1307,-605 h30
  text "VDD" at 1307,-725 h30
  text "-" at 265.02,-1218 h100 r270
  text "+" at 465.02,-1218 h100 r270
  text "VS" at 840,-1222 h30 r270
  text "SDA" at 1000,-1222 h30 r270
  text "SCL" at 1045,-1222 h30 r270
  text "GND" at 1195,-1222 h30 r270
Board Shape:
  lines w10: 0,-1120 ccw(c125,-1120) 125,-1245 1285,-1245 1330,-1200 1330,-395 1285,-350 1100,-350 cw(c1100,-225) 975,-225 975,-125 ccw(c850,-125) 850,0 125,0 ccw(c125,-125) 0,-125 0,-805 0,-1120